# Altium PCB PCB_SensorTapeFlex_v1.PcbDoc (part 2 of 4)
Units mm, origin at the board's own origin, x right, y up, seen from the top; angles counter-clockwise.
Board outline 228.71 x 24.8 mm, 2 copper layers (Top Layer, Bottom Layer); 234 components, 38 nets, 1134 pads, 768 vias.
Unrouted connection lines stored in the file: 1.
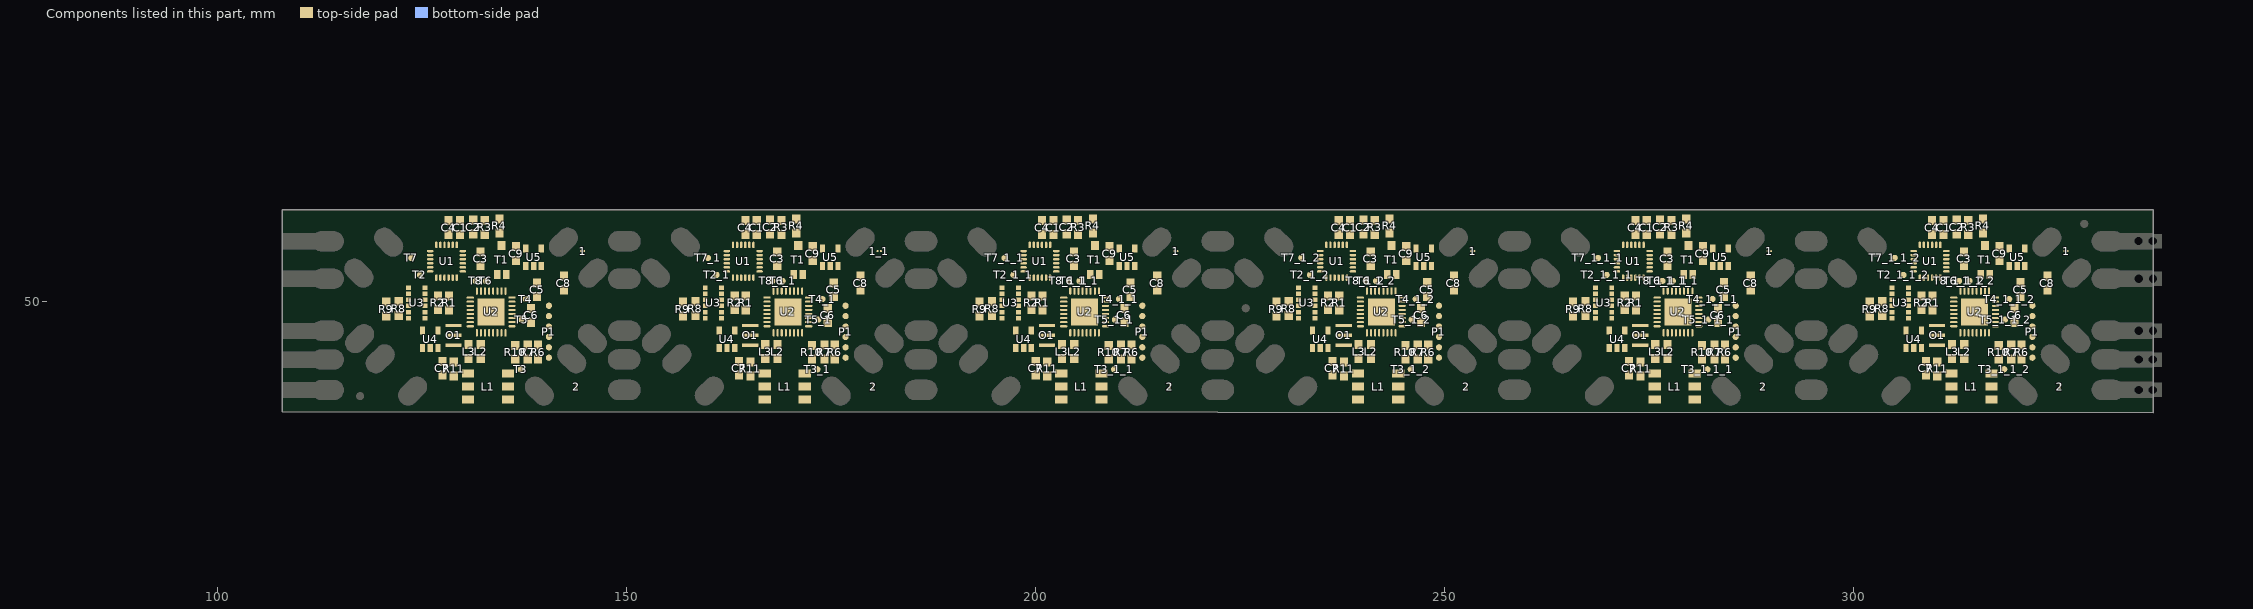
[diagram p2: the components of this part, seen from the top]

## Via types
v1: diameter 0.635, hole 0.381, Top Layer to Bottom Layer, tented both sides, 572 vias
v2: diameter 0.635, hole 0.4, Top Layer to Bottom Layer, tented both sides, 130 vias
v3: diameter 0.66, hole 0.33, Top Layer to Bottom Layer, tented both sides, 54 vias
v4: diameter 0.508, hole 0.508, Top Layer to Bottom Layer, tented both sides, 12 vias

## Nets (pads, with @x,y where several pads share a name; then routed paths per layer and width w, separated by ;. In a path a pad name is that pad's centre, name@x,y a point inside that pad or via, vN(x,y) a via of type N, cw(c..) or ccw(c..) an arc to the next point about the centre after c; other vN are vias at no path point) (continued)
pads on no net: 1.0@216.995,56.206 1.0@253.267,56.207 1.0@289.54,56.207 1.0@325.813,56.207 1.1@217.394,56.201 1.1@253.666,56.202 1.1@289.939,56.202 1.1@326.212,56.202 1_1.0 1_1.1 2.0@180.164,39.445 2.0@216.437,39.445 2.0@252.709,39.446 2.0@288.982,39.446 2.0@325.255,39.447 2.1@180.169,39.844 2.1@216.442,39.844 2.1@252.714,39.845 2.1@288.987,39.845 2.1@325.26,39.845 C1.1@165.94,58.23 C1.1@202.213,58.23 C1.1@238.485,58.231 C1.1@274.758,58.231 C1.1@311.031,58.232 C1.2@165.94,59.93 C1.2@202.213,59.93 C1.2@238.485,59.931 C1.2@274.758,59.931 C1.2@311.031,59.932 C2.1@167.566,58.281 C2.1@203.839,58.281 C2.1@240.111,58.282 C2.1@276.384,58.282 C2.1@312.657,58.282 C2.2@167.566,59.981 C2.2@203.839,59.981 C2.2@240.111,59.982 C2.2@276.384,59.982 C2.2@312.657,59.982 C3.1@168.455,56.121 C3.1@204.728,56.121 C3.1@241,56.122 C3.1@277.273,56.122 C3.1@313.546,56.122 C3.2@168.455,54.421 C3.2@204.728,54.421 C3.2@241,54.422 C3.2@277.273,54.422 C3.2@313.546,54.422 C4.1@164.552,58.225 C4.1@200.826,58.225 C4.1@237.097,58.226 C4.1@273.37,58.226 C4.1@309.644,58.227 C4.2@164.552,59.925 C4.2@200.826,59.925 C4.2@237.097,59.926 C4.2@273.37,59.926 C4.2@309.644,59.927 C5.1@175.364,52.336 C5.1@211.637,52.336 C5.1@247.908,52.337 C5.1@284.182,52.337 C5.1@320.455,52.338 C5.2@175.364,50.636 C5.2@211.637,50.636 C5.2@247.908,50.637 C5.2@284.182,50.637 C5.2@320.455,50.638 C6.1@174.627,49.187 C6.1@210.9,49.187 C6.1@247.172,49.188 C6.1@283.445,49.188 C6.1@319.718,49.188 C6.2@174.627,47.487 C6.2@210.9,47.487 C6.2@247.172,47.488 C6.2@283.445,47.488 C6.2@319.718,47.488 C7.1@163.781,42.735 C7.1@200.054,42.735 C7.1@236.326,42.736 C7.1@272.599,42.736 C7.1@308.872,42.737 C7.2@163.781,41.035 C7.2@200.054,41.035 C7.2@236.326,41.036 C7.2@272.599,41.036 C7.2@308.872,41.037 C8.1@178.64,53.149 C8.1@214.913,53.149 C8.1@251.185,53.15 C8.1@287.458,53.15 C8.1@323.731,53.151 C8.2@178.64,51.449 C8.2@214.913,51.449 C8.2@251.185,51.45 C8.2@287.458,51.45 C8.2@323.731,51.451 C9.1@172.798,55.055 C9.1@209.071,55.055 C9.1@245.343,55.056 C9.1@281.616,55.056 C9.1@317.889,55.057 C9.2@172.798,56.755 C9.2@209.071,56.755 C9.2@245.343,56.756 C9.2@281.616,56.756 C9.2@317.889,56.757 L1.1 L1.2@171.813,39.646 L1.2@208.086,39.646 L1.2@244.358,39.647 L1.2@280.631,39.647 L1.2@316.904,39.648 L1.3@171.813,41.246 L1.3@208.086,41.246 L1.3@244.358,41.247 L1.3@280.631,41.247 L1.3@316.904,41.247 L1.4 L1.5@166.911,39.646 L1.5@203.185,39.646 L1.5@239.456,39.647 L1.5@275.729,39.647 L1.5@312.003,39.648 L1.6@166.911,38.046 L1.6@203.184,38.046 L1.6@239.456,38.047 L1.6@275.729,38.047 L1.6@312.003,38.048 L2.1@168.48,44.767 L2.1@204.753,44.767 L2.1@241.025,44.768 L2.1@277.298,44.768 L2.1@313.571,44.769 L2.2@168.48,43.067 L2.2@204.753,43.067 L2.2@241.025,43.068 L2.2@277.298,43.068 L2.2@313.571,43.069 L3.1@166.982,44.767 L3.1@203.255,44.767 L3.1@239.526,44.768 L3.1@275.8,44.768 L3.1@312.073,44.769 L3.2@166.982,43.067 L3.2@203.255,43.067 L3.2@239.526,43.068 L3.2@275.8,43.068 L3.2@312.073,43.069 O1.1@165.152,44.706 O1.1@201.425,44.706 O1.1@237.697,44.708 O1.1@273.97,44.708 O1.1@310.244,44.708 O1.2@165.152,45.907 O1.2@201.425,45.907 O1.2@237.696,45.908 O1.2@273.969,45.908 O1.2@310.243,45.908 O1.3@165.152,47.106 O1.3@201.425,47.106 O1.3@237.697,47.108 O1.3@273.97,47.108 O1.3@310.243,47.108 P1.1@176.809,43.176 P1.1@213.082,43.175 P1.1@249.354,43.177 P1.1@285.627,43.177 P1.1@321.9,43.177 P1.2@176.807,44.445 P1.2@213.08,44.445 P1.2@249.352,44.446 P1.2@285.625,44.446 P1.2@321.898,44.446 P1.3@176.807,45.715 P1.3@213.08,45.715 P1.3@249.352,45.716 P1.3@285.625,45.716 P1.3@321.898,45.717 P1.4@176.807,46.986 P1.4@213.08,46.985 P1.4@249.352,46.987 P1.4@285.625,46.987 P1.4@321.899,46.987 P1.5@176.808,48.256 P1.5@213.081,48.256 P1.5@249.352,48.257 P1.5@285.625,48.257 P1.5@321.899,48.258 P1.6@176.807,49.526 P1.6@213.08,49.526 P1.6@249.352,49.528 P1.6@285.625,49.528 P1.6@321.898,49.528 R1.1@164.606,50.73 R1.1@200.879,50.729 R1.1@237.151,50.731 R1.1@273.424,50.731 R1.1@309.697,50.731 R1.2@164.606,49.03 R1.2@200.879,49.03 R1.2@237.151,49.031 R1.2@273.424,49.031 R1.2@309.697,49.031 R2.1@163.249,50.738 R2.1@199.522,50.737 R2.1@235.794,50.739 R2.1@272.067,50.739 R2.1@308.34,50.739 R2.2@163.249,49.038 R2.2@199.522,49.037 R2.2@235.794,49.039 R2.2@272.067,49.039 R2.2@308.34,49.039 R3.1@168.963,58.256 R3.1@205.236,58.255 R3.1@241.508,58.257 R3.1@277.781,58.257 R3.1@314.054,58.257 R3.2@168.963,59.955 R3.2@205.236,59.955 R3.2@241.508,59.957 R3.2@277.781,59.957 R3.2@314.054,59.957 R4.1@170.766,60.134 R4.1@207.039,60.134 R4.1@243.311,60.135 R4.1@279.584,60.135 R4.1@315.857,60.136 R4.2@170.766,58.434 R4.2@207.039,58.434 R4.2@243.311,58.435 R4.2@279.584,58.435 R4.2@315.857,58.436 R6.1@175.491,44.716 R6.1@211.764,44.716 R6.1@248.035,44.717 R6.1@284.309,44.717 R6.1@320.582,44.718 R6.2@175.491,43.016 R6.2@211.764,43.016 R6.2@248.035,43.017 R6.2@284.309,43.017 R6.2@320.582,43.018 R7.1@174.221,43.016 R7.1@210.494,43.015 R7.1@246.765,43.017 R7.1@283.039,43.017 R7.1@319.312,43.017 R7.2@174.221,44.715 R7.2@210.494,44.715 R7.2@246.765,44.717 R7.2@283.039,44.717 R7.2@319.312,44.717 R8.1@158.447,48.324 R8.1@194.72,48.324 R8.1@230.992,48.325 R8.1@267.265,48.325 R8.1@303.538,48.326 R8.2@158.447,50.024 R8.2@194.72,50.024 R8.2@230.992,50.025 R8.2@267.265,50.025 R8.2@303.538,50.026 R9.1@156.923,49.974 R9.1@193.196,49.974 R9.1@229.468,49.975 R9.1@265.741,49.975 R9.1@302.014,49.976 R9.2@156.923,48.274 R9.2@193.196,48.274 R9.2@229.468,48.275 R9.2@265.741,48.275 R9.2@302.014,48.276 R10.1@172.697,44.691 R10.1@208.97,44.691 R10.1@245.241,44.692 R10.1@281.515,44.692 R10.1@317.788,44.692 R10.2@172.697,42.991 R10.2@208.97,42.991 R10.2@245.241,42.992 R10.2@281.515,42.992 R10.2@317.788,42.992 R11.1@165.178,40.958 R11.1@201.451,40.958 R11.1@237.723,40.959 R11.1@273.996,40.959 R11.1@310.269,40.96 R11.2@165.178,42.658 R11.2@201.451,42.658 R11.2@237.723,42.659 R11.2@273.996,42.659 R11.2@310.269,42.66 T1.1@171.018,56.906 T1.1@207.291,56.906 T1.1@243.563,56.907 T1.1@279.836,56.907 T1.1@316.11,56.908 T1.2@170.468,53.356 T1.2@206.741,53.356 T1.2@243.013,53.357 T1.2@279.286,53.357 T1.2@315.56,53.358 T1.3 T2_1.0 T2_1_1.0 T2_1_1_1.0 T2_1_1_2.0 T2_1_2.0 T3_1.0 T3_1_1.0 T3_1_1_1.0 T3_1_1_2.0 T3_1_2.0 T4_1.0 T4_1_1.0 T4_1_1_1.0 T4_1_1_2.0 T4_1_2.0 T5_1.0 T5_1_1.0 T5_1_1_1.0 T5_1_1_2.0 T5_1_2.0 T6_1.0 T6_1_1.0 T6_1_1_1.0 T6_1_1_2.0 T6_1_2.0 T7_1.0 T7_1_1.0 T7_1_1_1.0 T7_1_1_2.0 T7_1_2.0 T8_1.0 T8_1_1.0 T8_1_1_1.0 T8_1_1_2.0 T8_1_2.0 U1.1 U1.2 U1.3 U1.4 U1.5 U1.6 U1.7 U1.8@166.291,54.215 U1.8@202.564,54.215 U1.8@238.836,54.217 U1.8@275.109,54.217 U1.8@311.383,54.217 U1.9@166.291,54.715 U1.9@202.564,54.715 U1.9@238.836,54.716 U1.9@275.109,54.716 U1.9@311.383,54.717 U1.10@166.291,55.215 U1.10@202.564,55.215 U1.10@238.836,55.216 U1.10@275.109,55.216 U1.10@311.383,55.217 U1.11@166.291,55.715 U1.11@202.564,55.715 U1.11@238.836,55.716 U1.11@275.109,55.716 U1.11@311.383,55.717 U1.12@166.291,56.215 U1.12@202.564,56.215 U1.12@238.836,56.216 U1.12@275.109,56.216 U1.12@311.383,56.216 U1.13@165.541,56.965 U1.13@201.815,56.965 U1.13@238.086,56.966 U1.13@274.359,56.966 U1.13@310.633,56.966 U1.14 U1.15 U1.16 U1.17 U1.18@163.042,56.965 U1.18@199.315,56.965 U1.18@235.587,56.966 U1.18@271.86,56.966 U1.18@308.133,56.966 U1.19 U1.20@162.292,55.715 U1.20@198.565,55.715 U1.20@234.837,55.716 U1.20@271.11,55.716 U1.20@307.383,55.716 U1.21 U1.22 U1.23@162.292,54.215 U1.23@198.565,54.215 U1.23@234.837,54.216 U1.23@271.11,54.216 U1.23@307.383,54.217 U1.24@162.292,53.715 U1.24@198.565,53.715 U1.24@234.837,53.716 U1.24@271.11,53.716 U1.24@307.383,53.717 U2.1@167.2,50.518 U2.1@203.473,50.518 U2.1@239.745,50.519 U2.1@276.018,50.519 U2.1@312.291,50.52 U2.2@167.2,50.018 U2.2@203.473,50.018 U2.2@239.745,50.019 U2.2@276.018,50.019 U2.2@312.291,50.02 U2.3@167.2,49.518 U2.3@203.473,49.518 U2.3@239.745,49.519 U2.3@276.018,49.519 U2.3@312.291,49.52 U2.4@167.2,49.018 U2.4@203.473,49.018 U2.4@239.745,49.019 U2.4@276.018,49.019 U2.4@312.291,49.02 U2.5@167.2,48.518 U2.5@203.473,48.518 U2.5@239.745,48.519 U2.5@276.018,48.519 U2.5@312.291,48.52 U2.6@167.2,48.018 U2.6@203.473,48.018 U2.6@239.745,48.019 U2.6@276.018,48.019 U2.6@312.291,48.02 U2.7@167.2,47.518 U2.7@203.473,47.518 U2.7@239.745,47.519 U2.7@276.018,47.519 U2.7@312.291,47.52 U2.8@167.2,47.018 U2.8@203.473,47.018 U2.8@239.745,47.019 U2.8@276.018,47.019 U2.8@312.291,47.02 U2.9@168,46.218 U2.9@204.273,46.218 U2.9@240.545,46.219 U2.9@276.818,46.219 U2.9@313.091,46.22 U2.10@168.5,46.218 U2.10@204.773,46.218 U2.10@241.045,46.219 U2.10@277.318,46.219 U2.10@313.592,46.22 U2.11@169,46.218 U2.11@205.273,46.218 U2.11@241.545,46.219 U2.11@277.818,46.219 U2.11@314.091,46.22 U2.12@169.5,46.218 U2.12@205.773,46.218 U2.12@242.045,46.219 U2.12@278.318,46.219 U2.12@314.592,46.22 U2.13@170,46.218 U2.13@206.273,46.218 U2.13@242.545,46.219 U2.13@278.818,46.219 U2.13@315.091,46.22 U2.14@170.5,46.218 U2.14@206.773,46.218 U2.14@243.045,46.219 U2.14@279.318,46.219 U2.14@315.592,46.22 U2.15@171,46.218 U2.15@207.273,46.218 U2.15@243.545,46.219 U2.15@279.818,46.219 U2.15@316.091,46.22 U2.16@171.5,46.218 U2.16@207.773,46.218 U2.16@244.045,46.219 U2.16@280.318,46.219 U2.16@316.592,46.22 U2.17@172.3,47.018 U2.17@208.573,47.018 U2.17@244.845,47.019 U2.17@281.118,47.019 U2.17@317.392,47.02 U2.18@172.3,47.518 U2.18@208.573,47.518 U2.18@244.845,47.519 U2.18@281.118,47.519 U2.18@317.392,47.52 U2.19@172.3,48.018 U2.19@208.573,48.018 U2.19@244.845,48.019 U2.19@281.118,48.019 U2.19@317.392,48.02 U2.20@172.3,48.518 U2.20@208.573,48.518 U2.20@244.845,48.519 U2.20@281.118,48.519 U2.20@317.392,48.52 U2.21@172.3,49.018 U2.21@208.573,49.018 U2.21@244.845,49.019 U2.21@281.118,49.019 U2.21@317.392,49.02 U2.22@172.3,49.518 U2.22@208.573,49.518 U2.22@244.845,49.519 U2.22@281.118,49.519 U2.22@317.392,49.52 U2.23@172.3,50.018 U2.23@208.573,50.018 U2.23@244.845,50.019 U2.23@281.118,50.019 U2.23@317.392,50.02 U2.24@172.3,50.518 U2.24@208.573,50.518 U2.24@244.845,50.519 U2.24@281.118,50.519 U2.24@317.392,50.52 U2.25@171.5,51.318 U2.25@207.773,51.318 U2.25@244.045,51.319 U2.25@280.318,51.319 U2.25@316.592,51.32 U2.26@171,51.318 U2.26@207.273,51.318 U2.26@243.545,51.319 U2.26@279.818,51.319 U2.26@316.091,51.32 U2.27@170.5,51.318 U2.27@206.773,51.318 U2.27@243.045,51.319 U2.27@279.318,51.319 U2.27@315.592,51.32 U2.28@170,51.318 U2.28@206.273,51.318 U2.28@242.545,51.319 U2.28@278.818,51.319 U2.28@315.091,51.32 U2.29@169.5,51.318 U2.29@205.773,51.318 U2.29@242.045,51.319 U2.29@278.318,51.319 U2.29@314.592,51.32 U2.30@169,51.318 U2.30@205.273,51.318 U2.30@241.545,51.319 U2.30@277.818,51.319 U2.30@314.091,51.32 U2.31@168.5,51.318 U2.31@204.773,51.318 U2.31@241.045,51.319 U2.31@277.318,51.319 U2.31@313.592,51.32 U2.32@168,51.318 U2.32@204.273,51.318 U2.32@240.545,51.319 U2.32@276.818,51.319 U2.32@313.091,51.32 U2.33@169.75,48.768 U2.33@206.023,48.768 U2.33@242.295,48.769 U2.33@278.568,48.769 U2.33@314.841,48.77 U3.1@159.654,51.749 U3.1@195.927,51.749 U3.1@232.199,51.75 U3.1@268.472,51.75 U3.1@304.745,51.75 U3.2 U3.3 U3.4@159.655,49.501 U3.4@195.928,49.501 U3.4@232.199,49.502 U3.4@268.472,49.502 U3.4@304.746,49.502 U3.5@159.654,48.751 U3.5@195.927,48.751 U3.5@232.199,48.753 U3.5@268.472,48.753 U3.5@304.745,48.753 U3.6@159.654,48.002 U3.6@195.927,48.002 U3.6@232.199,48.003 U3.6@268.472,48.003 U3.6@304.745,48.003 U3.7 U3.8@161.655,48.75 U3.8@197.928,48.75 U3.8@234.2,48.751 U3.8@270.473,48.751 U3.8@306.746,48.751 U3.9@161.655,49.499 U3.9@197.929,49.499 U3.9@234.2,49.5 U3.9@270.473,49.5 U3.9@306.747,49.501 U3.10@161.655,50.249 U3.10@197.928,50.249 U3.10@234.2,50.25 U3.10@270.473,50.25 U3.10@306.746,50.251 U3.11 U3.12@161.655,51.747 U3.12@197.928,51.747 U3.12@234.2,51.748 U3.12@270.473,51.748 U3.12@306.746,51.749 U4.1@161.349,44.349 U4.1@197.622,44.349 U4.1@233.894,44.35 U4.1@270.167,44.35 U4.1@306.44,44.351 U4.2@162.299,44.349 U4.2@198.572,44.349 U4.2@234.844,44.35 U4.2@271.117,44.35 U4.2@307.391,44.351 U4.3@163.249,44.349 U4.3@199.522,44.349 U4.3@235.794,44.35 U4.3@272.067,44.35 U4.3@308.341,44.351 U4.4 U4.5@161.349,46.499 U4.5@197.622,46.499 U4.5@233.894,46.5 U4.5@270.167,46.5 U4.5@306.44,46.501 U5.1@173.988,54.381 U5.1@210.261,54.381 U5.1@246.533,54.382 U5.1@282.806,54.382 U5.1@319.079,54.382 U5.2@174.938,54.381 U5.2@211.211,54.381 U5.2@247.483,54.382 U5.2@283.756,54.382 U5.2@320.029,54.382 U5.3@175.888,54.381 U5.3@212.161,54.381 U5.3@248.433,54.382 U5.3@284.706,54.382 U5.3@320.979,54.382 U5.4 U5.5@173.988,56.531 U5.5@210.261,56.531 U5.5@246.533,56.532 U5.5@282.806,56.532 U5.5@319.079,56.532